# Altium PCB CC3000Module.PcbDoc
Units mil, origin at the board's own origin, x right, y up, seen from the top; angles counter-clockwise.
Board outline 1072.83 x 1344.49 mil, 4 copper layers (Top Layer, GND1, GND2, Bottom Layer), stack 61.4 mil thick; 10 components, 18 nets, 83 pads, 100 vias.
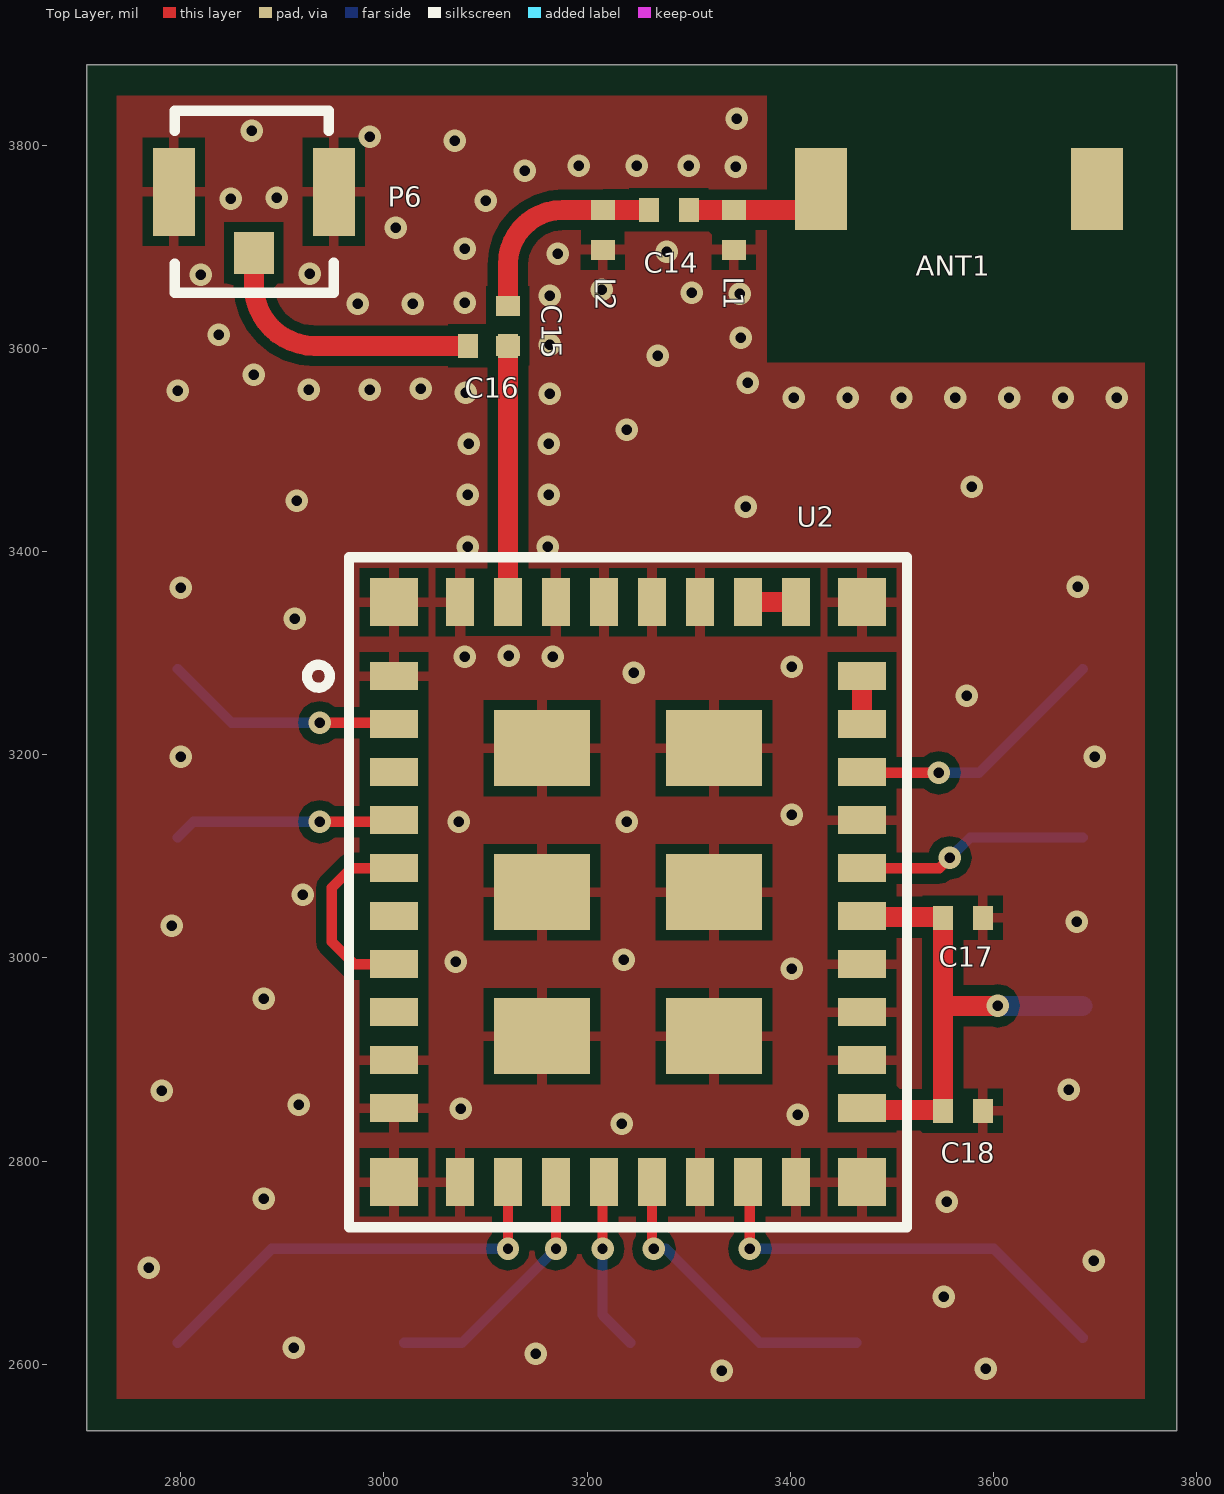
[diagram p0: Top Layer view]
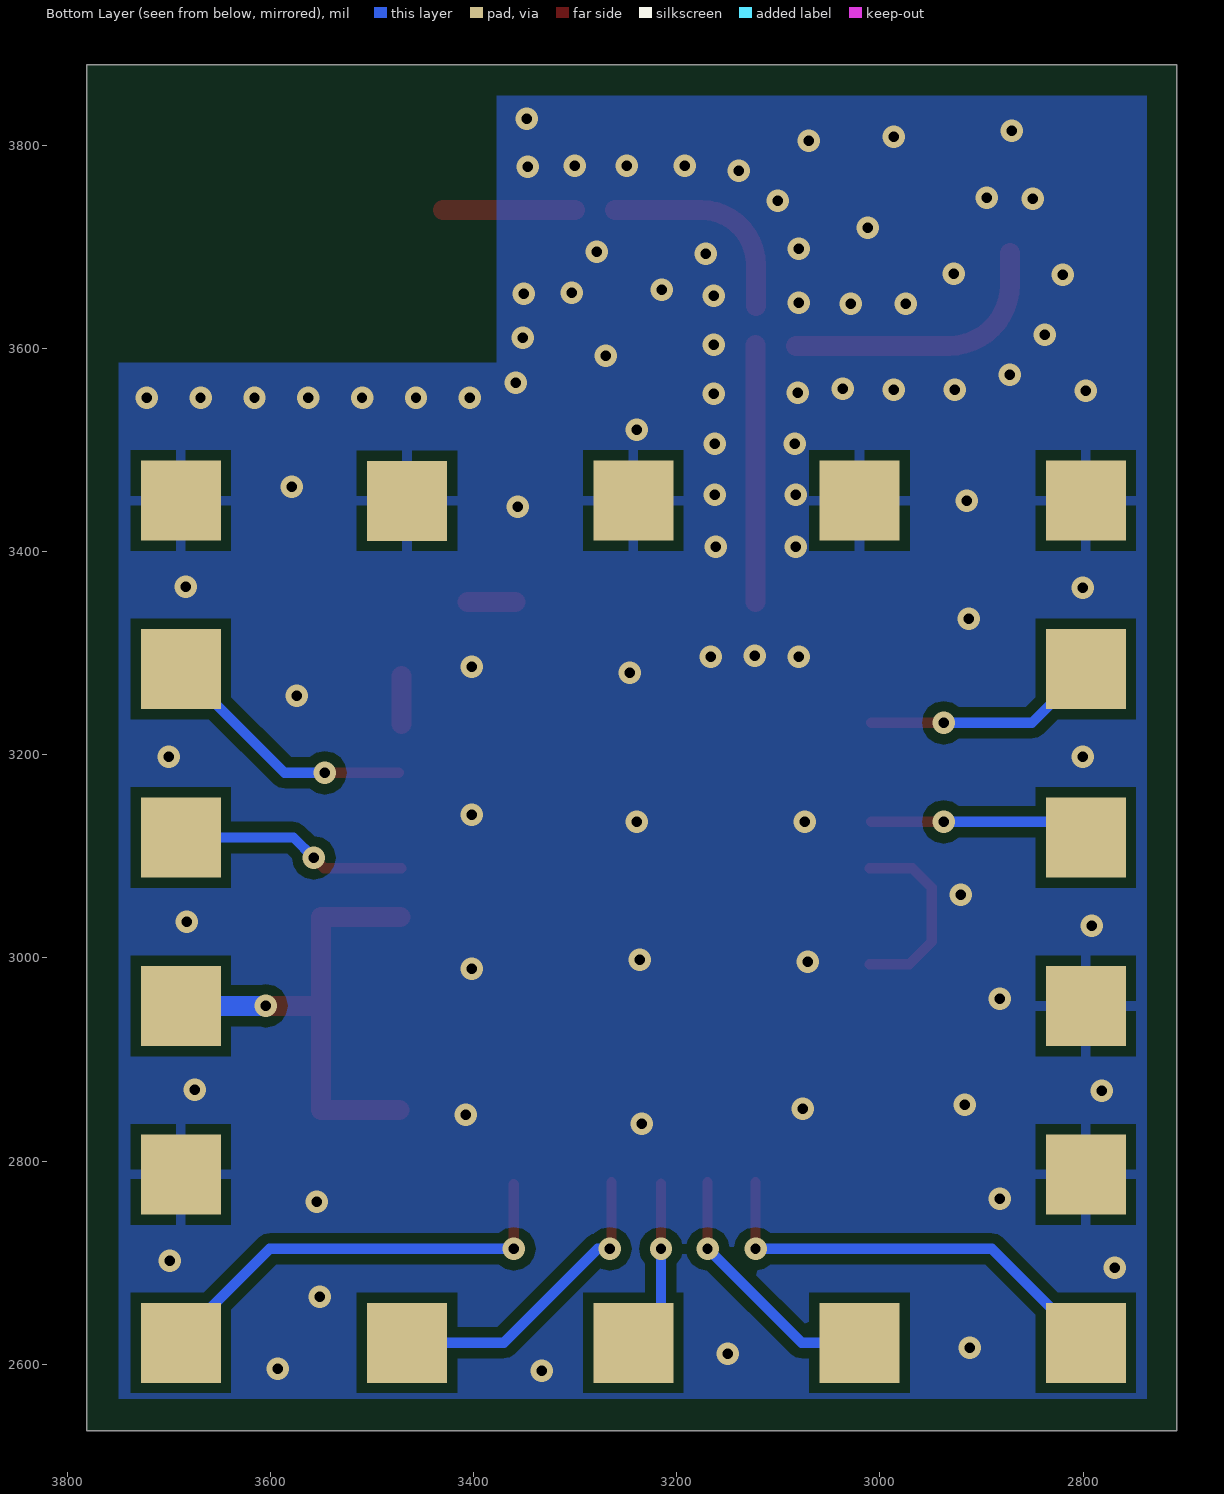
[diagram p1: Bottom Layer view, seen from below]
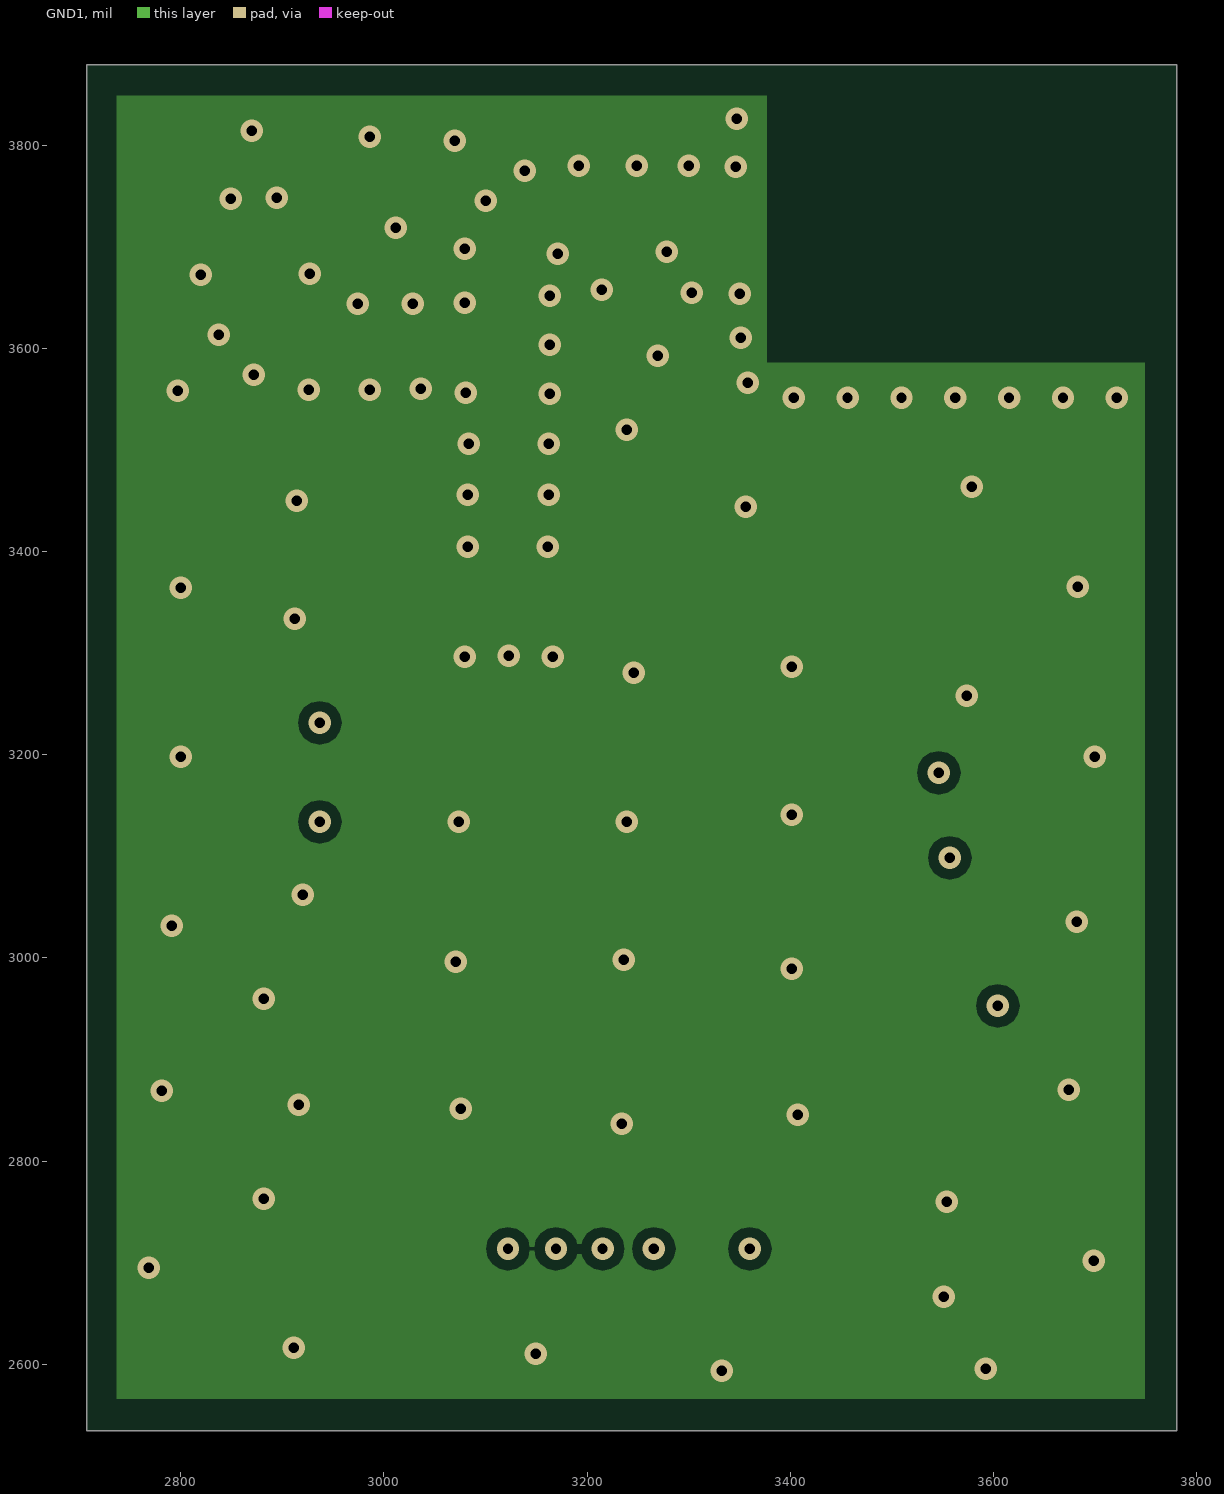
[diagram p2: GND1]
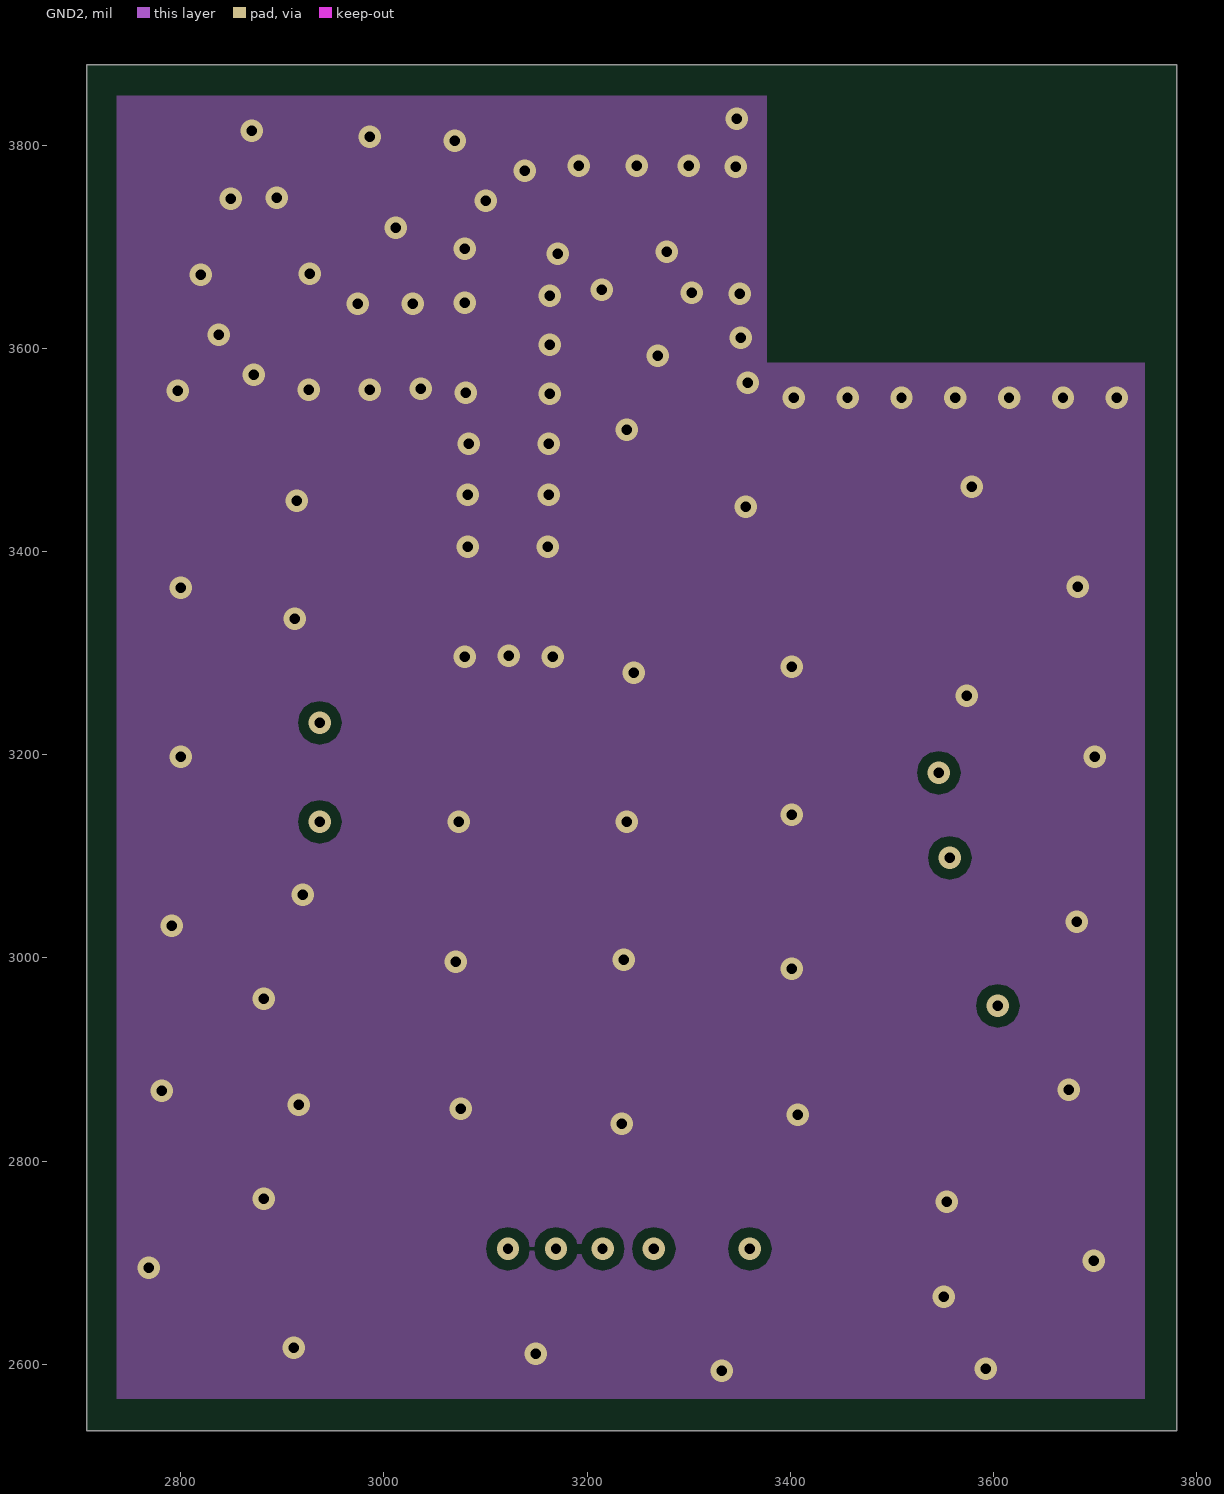
[diagram p3: GND2]

## Layer stack, top to bottom
Top Layer: signal copper 1
Dielectric: core 9, FR-4, Dk 4.8
GND1: signal copper 1.4
Dielectric: prepreg 39, FR-4, Dk 4.8
GND2: signal copper 1
Dielectric: core 9, FR-4, Dk 4.8
Bottom Layer: signal copper 1

## Board outline
2707.68,3878.94 2707.68,2534.45 3780.51,2534.45 3780.51,3878.94

## Design rules (kind name [scope] priority, off if disabled: settings)
Clearance [All] p1: gap=10
HoleSize [All] p1: absolutevalues=TRUE maxlimit=250 minlimit=6 maxpercent=80.000 minpercent=20.000
MinimumAnnularRing [All] p1: minimumring=6
PlaneConnect [All] p1: planeconnectstyle=Direct reliefexpansion=20 reliefentries=4 reliefconductorwidth=10 reliefairgap=10
PolygonConnect ViaConnect [All vs IsVia] p1: connectstyle=Direct reliefconductorwidth=10 reliefentries=4 polygonreliefangle="90 Angle"
PolygonConnect [All] p2: connectstyle=Relief reliefconductorwidth=10 reliefentries=4 polygonreliefangle="90 Angle"
RoutingVias [All] p1: holewidth=6 width=8 viastyle="Through Hole" minholewidth=6 minwidth=8 maxholewidth=28 maxwidth=50
SilkscreenOverComponentPads [All] p1: minsilkscreentomaskgap=10
SolderMaskExpansion [All] p1: expansion=4
Width [All] p1: maxlimit=50 minlimit=10 preferedwidth=10
25 further rules are at their usual default settings.

## Components (designator, comment, footprint, x,y, rotation, side; value= is the part's Value field where it differs from the comment)
ANT1 "ANT-SMT-2" 2500AT44M0400 3430.12,3756.89 r0 top
C14 "Cap" 0402 3280.51,3736.22 r180 top
C15 "Cap" 0402 3122.05,3622.05 r90 top
C16 "Cap" 0402 3102.36,3602.36 r0 top
C17 "Cap" 0402 3569.88,3039.37 r180 top
C18 "Cap" 0402 3569.88,2849.41 r180 top
L1 "Inductor" 0402 3344.49,3716.54 r90 top
L2 "Inductor" 0402 3215.55,3716.54 r90 top
P6 "U.FL" U.FL-R-SMT-1 2872.05,3693.9 r0 top
U2 "CC3000" CC3000 3010,3350 r0 top

## Footprints (in the part's own frame and the unit in brackets; to place one, negate y for a bottom-side part, rotate by r counter-clockwise, add the part's x,y. Pads: shape width x height; smd on the part's side, far side on the other; paste and mask are expansions set on the pad)
0402 [mm]
  rect 0.5x0.6 smd: 1(-0.5,0) 2(0.5,0)
2500AT44M0400 [mm] "2.4 GHz Chip Antenna"
  rect 1.3x2.05 smd: 1(0,0) 2(6.9,0)
CC3000 [mm] "CC3000 WLAN Module"
  rect 1.2x0.7 smd: 1(0,-1.85) 2(0,-3.05) 3(0,-4.25) 4(0,-5.45) 5(0,-6.65) 6(0,-7.85) 7(0,-9.05) 8(0,-10.25) 9(0,-11.45) 10(0,-12.65) 19(11.7,-12.65) 20(11.7,-11.45) 21(11.7,-10.25) 22(11.7,-9.05) 23(11.7,-7.85) 24(11.7,-6.65) 25(11.7,-5.45) 26(11.7,-4.25) 27(11.7,-3.05) 28(11.7,-1.85)
  rect 0.7x1.2 smd: 11(1.65,-14.5) 12(2.85,-14.5) 13(4.05,-14.5) 14(5.25,-14.5) 15(6.45,-14.5) 16(7.65,-14.5) 17(8.85,-14.5) 18(10.05,-14.5) 29(10.05,0) 30(8.85,0) 31(7.65,0) 32(6.45,0) 33(5.25,0) 34(4.05,0) 35(2.85,0) 36(1.65,0)
  rect 2.4x1.9 smd: 37(3.7,-3.65) 38(3.7,-7.25) 39(3.7,-10.85) 40(8,-3.65) 41(8,-7.25) 42(8,-10.85)
  rect 1.2x1.2 smd: 43(0,0) 44(0,-14.5) 45(11.7,-14.5) 46(11.7,0)
  silkscreen extent -2.18,-15.63 12.83,1.13
U.FL-R-SMT-1 [mm] "U.FL Connector"
  rect 1.05x2.2 smd: 1(-2,1.525) 3(2,1.525)
  rect 1x1.05 smd: 2(0,0)
  silkscreen extent -1.97,-1 2,3.55

## Part data
C14 C15 C16 C17 C18: "Capacitor"
P6: library part "Header 3", "Header, 3-Pin"
U2: "CC3000 WLAN Module"

## Free pads (board coordinates)
  rect 78.74x78.74 smd far side: 1(2797.24,3284.21) 2(2797.24,3118.43) 3(2797.24,2952.64) 4(2797.24,2786.85) 5(2797.24,2621.06) 6(3019.93,2621.06) 7(3242.62,2621.06) 8(3465.3,2621.06) 9(3687.99,2621.06) 10(3687.99,2786.85) 11(3687.99,2952.64) 12(3687.99,3118.42) 13(3687.99,3284.21) 14(3687.99,3450) 15(3465.31,3449.8) 16(3242.62,3450) 17(3019.93,3450) 18(2797.24,3450)

## Via types
v1: diameter 22, hole 10, Top Layer to Bottom Layer, 100 vias

## Nets (pads, with @x,y where several pads share a name; then routed paths per layer and width w, separated by ;. In a path a pad name is that pad's centre, name@x,y a point inside that pad or via, vN(x,y) a via of type N, cw(c..) or ccw(c..) an arc to the next point about the centre after c; other vN are vias at no path point)
3V3: C17.2 C18.2 pad.11 U2.19 U2.23 | length 482.3
  Top Layer w19.68: U2.23@3471.57,3040 C17.2@3550.2,3040 ; U2.19@3472.6,2850 3550.2,2850 C17.2 ; 3551.18,2952.76 v1(3604.33,2952.76)
  Bottom Layer w19.68: v1(3604.33,2952.76) pad.11@3687.87,2952.76
GND: C17.1 C18.1 L1.1 L2.1 P6.1 P6.3 pad.3 pad.4 pad.10 pad.14 pad.15 pad.16 pad.17 pad.18 U2.1 U2.9 U2.10 U2.11 U2.16 U2.18 U2.20 U2.21 U2.22 U2.25 U2.31 U2.32 U2.33 U2.34 U2.36 U2.37 U2.38 U2.39 U2.40 U2.41 U2.42 U2.43 U2.44 U2.45 U2.46
  other v1: 3332.68,2593.5 3592.52,2595.47 3149.61,2610.24 2911.42,2616.14 3551.18,2666.34 2768.7,2694.88 3698.82,2701.77 3554.13,2759.84 2881.89,2762.8 3234.25,2836.61 3407.48,2845.47 3075.79,2851.38 2916.34,2855.32 2781.5,2869.09 3674.21,2870.08 2881.89,2959.65 3401.57,2989.17 3070.87,2996.06 3236.22,2998.03 2791.34,3031.5 3682.09,3035.43 2920.28,3062.01 3073.82,3133.86 3239.17,3133.86 3401.57,3140.75 2800.2,3197.83 3699.8,3197.83 3573.82,3257.87 3246.06,3280.51 3401.57,3286.42 3079.72,3296.26 3166.34,3296.26 3123.03,3297.24 2912.4,3333.66 2800.2,3364.17 3683.07,3365.16 3082.68,3404.53 3161.42,3404.53 3356.3,3443.9 2914.37,3449.8 3082.68,3455.71 3162.4,3455.71 3578.74,3463.58 3083.66,3505.91 3162.4,3505.91 3239.17,3519.68 3403.54,3551.18 3456.53,3551.18 3509.51,3551.18 3562.5,3551.18 3615.49,3551.18 3668.47,3551.18 3721.46,3551.18 3163.39,3555.12 3080.71,3556.1 2797.24,3558.07 2926.18,3559.06 2986.22,3559.06 3036.42,3560.04 3358.27,3565.94 2872.05,3573.82 3269.68,3592.52 3163.39,3603.35 3351.38,3610.24 2837.6,3613.19 2974.41,3643.7 3028.54,3643.7 3079.72,3644.68 3163.39,3651.57 3350.39,3653.54 3303.15,3654.53 3214.57,3657.48 2819.88,3672.24 2927.17,3673.23 3171.26,3692.91 3278.54,3694.88 3079.72,3697.83 3011.81,3718.5 3100.39,3745.08 2849.41,3747.05 2894.68,3748.03 3138.78,3774.61 3346.46,3778.54 3191.93,3779.53 3249.02,3779.53 3300.2,3779.53 3069.88,3804.13 2986.22,3808.07 2870.08,3813.98 3347.44,3825.79
NetANT1_1: ANT1.1 C14.1 L1.2 | length 129.9
  Top Layer w19.68: C14.1 L1.2 ANT1.1@3430.12,3736.22
NetC14_2: C14.2 C15.2 L2.2 | length 210.1
  Top Layer w19.68: C15.2 3122,3682.04 cw(c3176.18,3682.04) 3176.18,3736.22 L2.2 C14.2
NetC15_1: C15.1 C16.2 U2.35 | length 253.2
  Top Layer w19.68: U2.35 C15.1@3122.2,3603.15
NetC16_1: C16.1 P6.2 | length 370.3
  Top Layer w19.68: P6.2 2872.05,3662.01 ; C16.1 2931.69,3602.36 ; 2872.05,3662.01 ccw(c2931.69,3662.01) 2931.69,3602.36 ; 2872.05,3662.01 ccw(c2931.69,3662.01) 2931.69,3602.36
NetU2_5: U2.5 U2.7 | length 192.6
  Top Layer w10: U2.7 2970.87,2993.7 2948.82,3015.75 2948.82,3068.9 2968.11,3088.19 U2.5
NetU2_12: pad.5 U2.12 | length 428.8
  Top Layer w10: v1(3122.2,2713.58) U2.12
  Bottom Layer w10: pad.5 2889.76,2713.58 v1(3122.2,2713.58)
NetU2_13: pad.6 U2.13 | length 253.4
  Top Layer w10: v1(3169.45,2713.58) U2.13
  Bottom Layer w10: pad.6 3076.93,2621.06 v1(3169.45,2713.58)
NetU2_14: pad.7 U2.14 | length 168.1
  Top Layer w10: v1(3215.41,2713.58) U2.14@3215.41,2777.85
  Bottom Layer w10: v1(3215.41,2713.58) 3215.41,2648.27 pad.7
NetU2_15: pad.8 U2.15 | length 301.2
  Top Layer w10: U2.15 3263.94,2718.35 v1@3265.75,2716.54
  Bottom Layer w10: v1(3265.75,2713.58) 3277.56,2713.58 3370.08,2621.06 pad.8
NetU2_17: pad.9 U2.17 | length 427.8
  Top Layer w10: v1(3360.24,2713.58) U2.17@3360.24,2777.32
  Bottom Layer w10: v1(3360.24,2713.58) 3600.39,2713.58 pad.9@3687.99,2625.98
NetU2_26: pad.13 U2.26 | length 256.9
  Top Layer w10: U2.26@3473.43,3182.09 v1(3546.26,3182.09)
  Bottom Layer w10: v1(3546.26,3182.09) 3585.87,3182.09 pad.13
NetU2_27: U2.27 U2.28 | length 47.2
  Top Layer w19.68: U2.27 U2.28
NetU2_29: U2.29 U2.30 | length 47.2
  Top Layer w19.68: U2.30 U2.29
RESERVED_1: pad.1 U2.2 | length 233.3
  Top Layer w10: v1(2937.01,3231.3) U2.2@3008.62,3231.3
  Bottom Layer w10: pad.1 2850.16,3231.3 v1(2937.01,3231.3)
RESERVED_2: pad.2 U2.4 | length 217.6
  Top Layer w10: v1(2937.01,3133.86) U2.4@3008.42,3133.86
  Bottom Layer w10: pad.2 2812.68,3133.86 v1(2937.01,3133.86)
RESERVED_3: pad.12 U2.24 | length 229.9
  Top Layer w10: U2.24 3546.85,3088.19 v1(3557.09,3098.43)
  Bottom Layer w10: v1(3557.09,3098.43) 3577.09,3118.42 pad.12
pads on no net: ANT1.2 U2.3 U2.6 U2.8

## Polygon pours and split planes (outlines as drawn)
GND on Top Layer "Top Layer-No Net" (solid, remove dead copper, pour order 8): 2737.2,3848.43 2737.2,2565.94 3749.02,2565.94 3749.02,3585.63 3376.97,3585.63 3376.97,3848.43
GND on Bottom Layer "Top Layer-No Net" (solid, remove dead copper, pour order 10): 2737.2,3848.43 2737.2,2565.94 3749.02,2565.94 3749.02,3585.63 3376.97,3585.63 3376.97,3848.43
GND on GND1 "Top Layer-No Net" (solid, remove dead copper, pour order 12): 2737.2,3848.43 2737.2,2565.94 3700.79,2565.94 3749.02,2565.94 3749.02,3585.63 3376.97,3585.63 3376.97,3587.6 3376.97,3848.43
GND on GND2 "Top Layer-No Net" (solid, remove dead copper, pour order 14): 2737.2,3848.43 3376.97,3848.43 3376.97,3833.66 3376.97,3585.63 3749.02,3585.63 3749.02,2565.94 2737.2,2565.94